# Altium PCB PCB2.PcbDoc
Units mil, origin at the board's own origin, x right, y up, seen from the top; angles counter-clockwise.
Board outline 1871.68 x 1704.78 mil, 2 copper layers (Top Layer, Bottom Layer); 45 components, 36 nets, 194 pads, 124 vias.
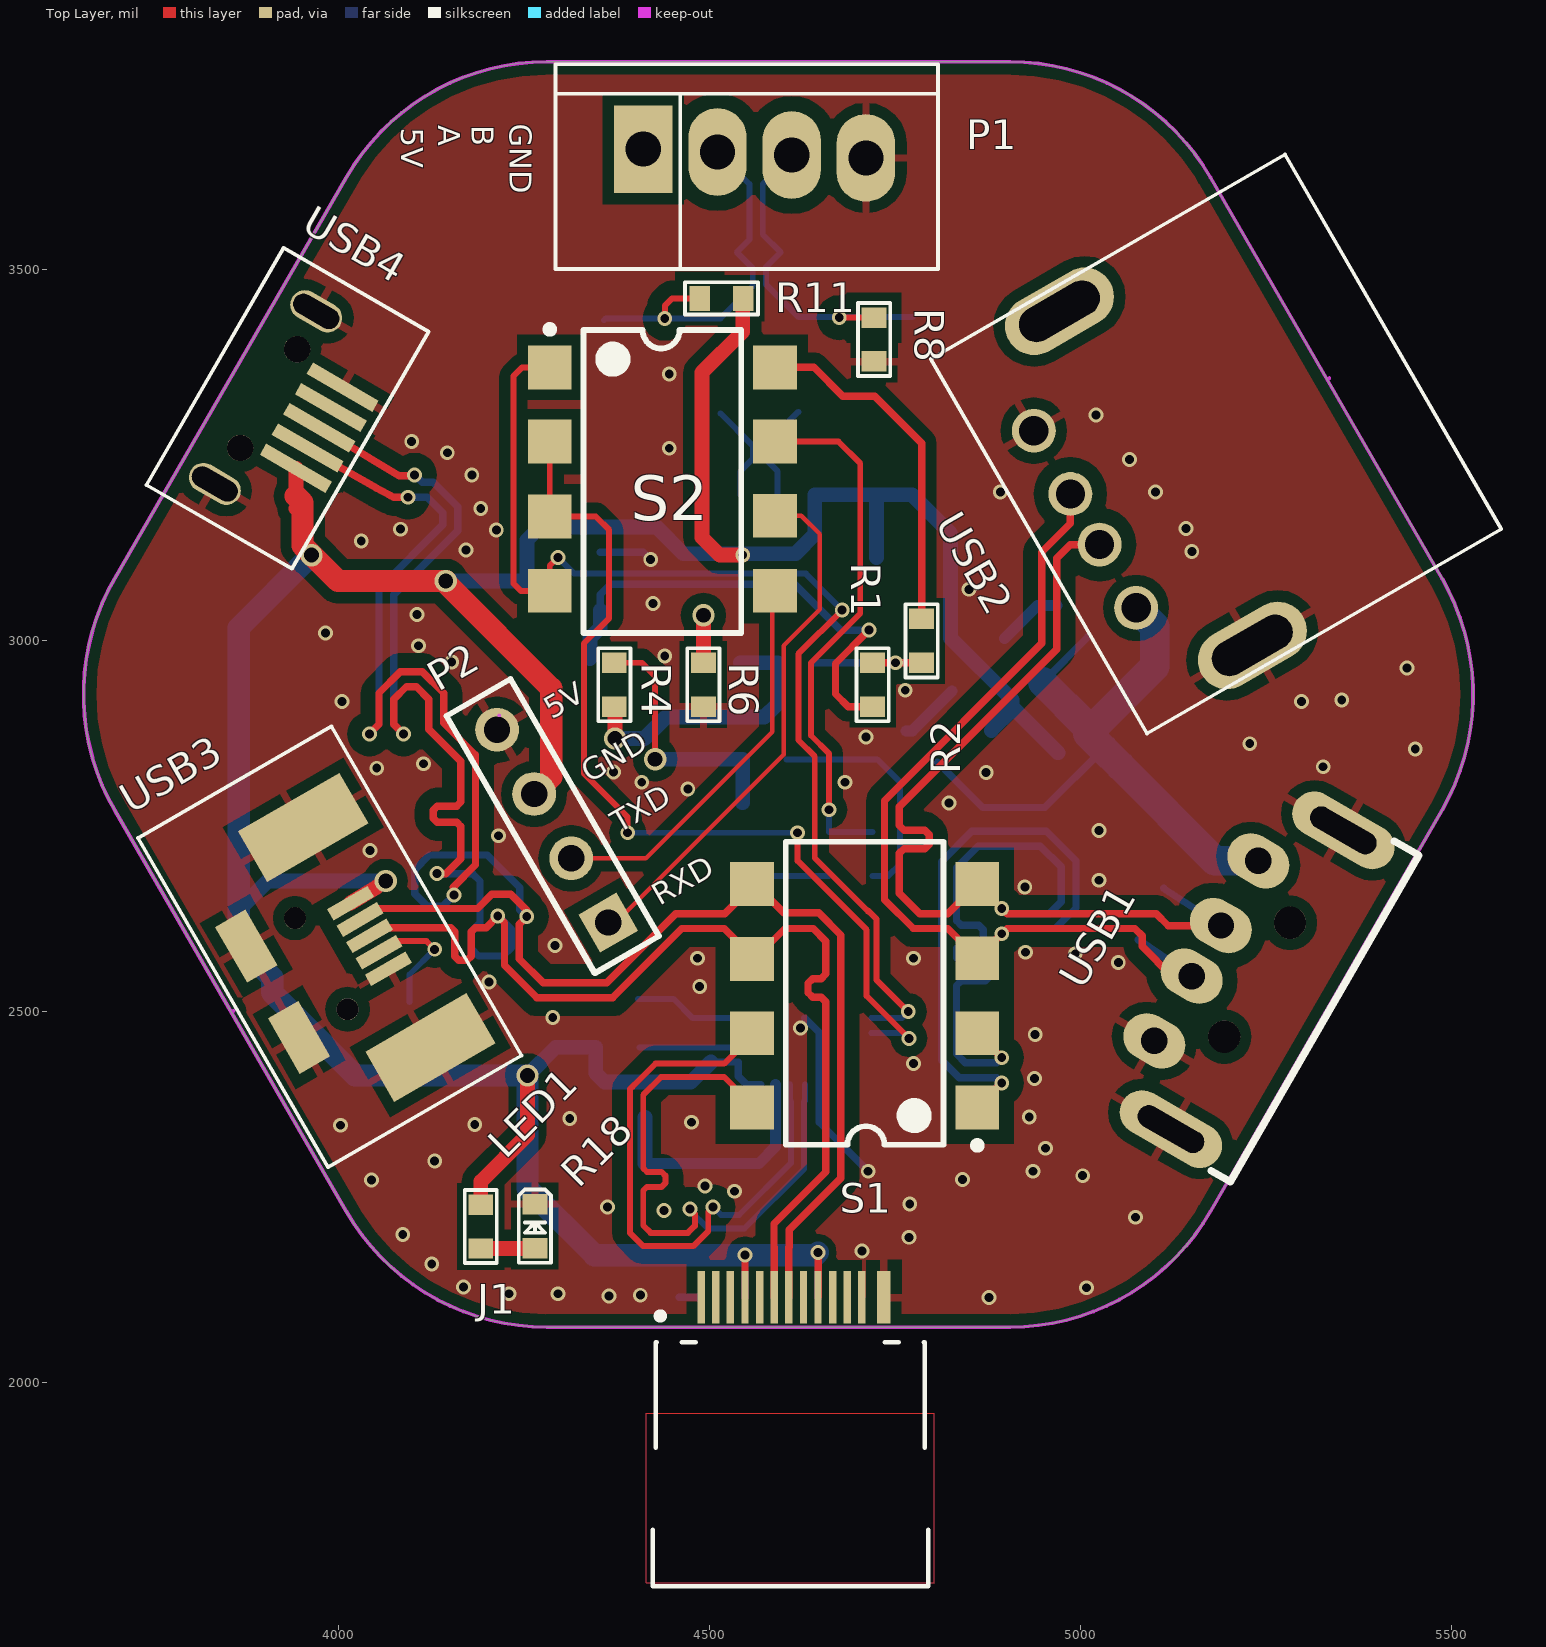
[diagram p0: Top Layer view]
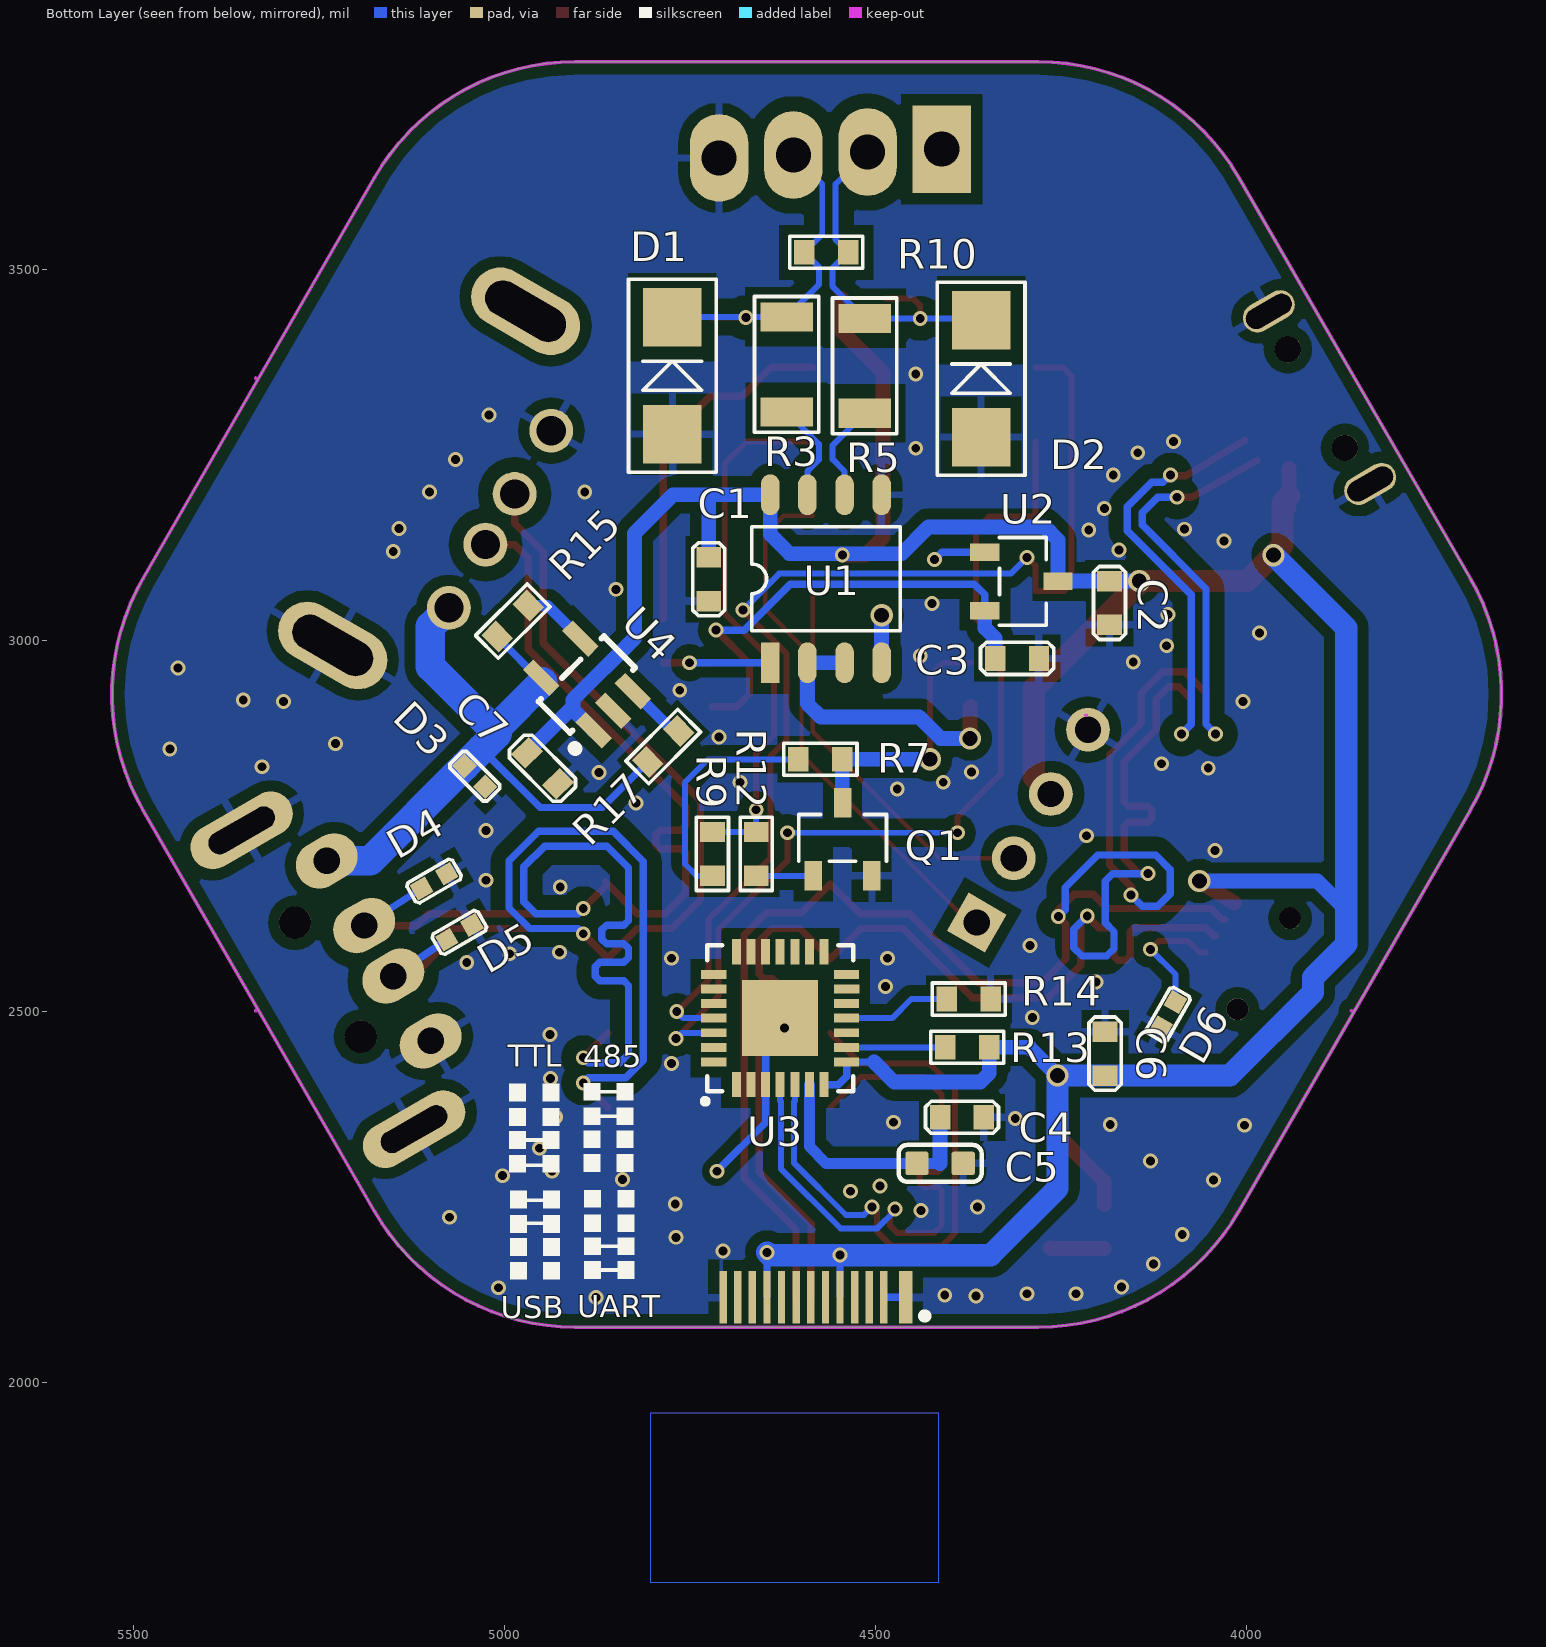
[diagram p1: Bottom Layer view, seen from below]

## Layer stack, top to bottom
Top Layer: signal copper 1.4
Dielectric: dielectric 12.6, FR-4, Dk 4.8
Bottom Layer: signal copper 1.4

## Board outline
4010.8,2231 3698.81,2771.39 cw(c3969,2927.39) 3698.81,3083.39 4010.8,3623.78 cw(c4281,3467.78) 4281,3779.78 4904.99,3779.78 cw(c4904.99,3467.78) 5175.19,3623.78 5487.18,3083.39 cw(c5216.99,2927.39) 5487.18,2771.39 5175.19,2231 cw(c4904.99,2387) 4904.99,2075 4281,2075 cw(c4281,2387)

## Design rules (kind name [scope] priority, off if disabled: settings)
Clearance usb [InNetClass('usb')] p1: gap=5
Clearance gnd [InPolygon] p2: gap=15
Clearance [All] p3: gap=5
DiffPairsRouting [All] p1: maxlimit=10 minlimit=6 mostfreqgap=10 maxuncoupledlength=500
PolygonConnect [IsVia] p1: connectstyle=Direct reliefconductorwidth=10 reliefentries=4 polygonreliefangle="90 Angle"
PolygonConnect PolygonConnect_1 [All] p2: connectstyle=Relief reliefconductorwidth=10 reliefentries=4 polygonreliefangle="90 Angle"
RoutingVias RoutingVias_1 [All] p1: holewidth=28 width=50 viastyle="Through Hole" minholewidth=28 minwidth=50 maxholewidth=28 maxwidth=50
RoutingVias [All] p2: holewidth=28 width=50 viastyle="Through Hole" minholewidth=28 minwidth=50 maxholewidth=28 maxwidth=50
SilkscreenOverComponentPads [All] p1: minsilkscreentomaskgap=1
SolderMaskExpansion [All] p1: expansion=4
Width [All] p1: maxlimit=200 minlimit=5 preferedwidth=10
26 further rules are at their usual default settings.

## Classes and differential pairs
net class usb: 485_N 485_P 4852_N 4852_P D2_N D2_P D3_N D3_P D_N D_P
component class 485: C1 C2 C3 D1 D2 D8 P1 Q1 Q19 R1 R2 R3 R4 R5 R6 R7 R8 R9 R10 R11 R12 R41 R43 R58 R83 R139 R218 U1 U2
component class connector: C4 C5 C6 C7 C61 D3 D4 D5 D6 D7 J1 LED1 "MICRO USB" P2 P3 R13 R14 R15 R17 R18 R19 R42 S1 S2 U3 U4 U7 USB1 USB2 USB3 USB4
differential pair 485: +485_P -485_N
differential pair 4852: +4852_P -4852_N
differential pair D: +D_P -D_N
differential pair D2: +D2_P -D2_N
differential pair D3: +D3_P -D3_N

## Components (designator, comment, footprint, x,y, rotation, side; value= is the part's Value field where it differs from the comment)
C1 "0.1uF" 0603C 4725,3053 r90 bottom
C2 "10uF/25V" 0603C 4185,3021 r90 bottom
C3 "10uF/25V" 0603C 4280,2976 r0 bottom
C4 "4.7uF/25V" 0603C 4354.25,2357.65 r0 bottom
C5 "0.1uF/50V" C0603 4413.25,2295.65 r180 top
C6 "10uF" 0603C 4191,2473 r270 bottom
C7 "47uF" 0603C 4928,2807 r45 bottom
D1 "SMAJ6.5CA" SMA 4774,3278 r90 bottom
D2 "SMAJ6.5CA" SMA 4358,3274 r90 bottom
D3 "PESDNC2FD5VB" C0402 5054,2831 r225 bottom
D4 "PESDNC2FD5VB" C0402 5112,2666 r150 bottom
D5 "PESDNC2FD5VB" C0402 5078,2597 r150 bottom
D6 "PESDNC2FD5VB" C0402 4096,2513 r300 bottom
J1 "TYPE C" Type_C-M 4489,2115 r0 top
LED1 "" 0603LED 4265,2181.55 r90 top
P1 "Header 4" 4X2.54MMZ 4411,3662 r0 top
P2 "Header 4" HDR1X4 4364,2620 r120 top
Q1 "MMBT3904" SOT23-3 4584,2683 r270 bottom
R1 "100k" 0603R 4720,2970 r270 top
R2 "1K" 0603R 4786,2970 r90 top
R3 "10" 1206R 4620,3436 r270 bottom
R4 "1K" 0603R 4372,2911 r90 top
R5 "10" 1206R 4515,3434 r270 bottom
R6 "1K" 0603R 4492,2970 r270 top
R7 "10K" 0603R 4545,2840 r0 bottom
R8 "1k" 0603R 4722,3435 r270 top
R9 "10K" 0603R 4720,2683 r90 bottom
R10 "100" 0603R 4537,3523 r0 bottom
R11 "1k" 0603R 4546,3461 r180 top
R12 "4.7K" 0603R 4661,2683 r90 bottom
R13 "1K/5%/1/8W" 0603R 4347,2452 r0 bottom
R14 "10K/5%/1/8W" 0603R 4345,2517 r0 bottom
R15 "10K/5%/1/8W" 0603R 4968,3047 r315 bottom
R17 "10K/5%/1/8W" 0603R 4765.31,2878.1 r315 bottom
R18 "1K" 0603R 4192,2240 r270 top
S1 "SW DIP-4" SW_SMT_8 4711,2421 r180 top
S2 "SW DIP-4" SW_SMT_8 4435,3318 r0 top
U1 "THVD1500" so-8 4642,2970 r90 bottom
U2 "XC6206P332MR" SOT23-3 4353,3119 r0 bottom
U3 "CP2102" QFN28N5X5-0p5P-L 4628.67,2491.21 r90 bottom
U4 "JW7115-2" SOT-23-5 4880,2879 r45 bottom
USB1 "USB-A-M" USB_A/P_A 5238,2543 r60 top
USB2 "USB-A-F" USB-A 5075,3044 r120 top
USB3 "Micro-USB" "MICRO USB M" 4042,2602 r30 top
USB4 "USB-MINI-A" MINIUSB-M 3943,3232 r330 top

## Footprints (in the part's own frame and the unit in brackets; to place one, negate y for a bottom-side part, rotate by r counter-clockwise, add the part's x,y. Pads: shape width x height; smd on the part's side, far side on the other; paste and mask are expansions set on the pad)
4X2.54MMZ [mm]
  rect 2x3 hole 1.2: 1(0,0)
  oval 2x3 hole 1.2: 2(2.54,-0.1) 3(5.08,-0.2) 4(7.62,-0.3)
  silkscreen extent -3,-4.1 10.08,2.9
0603C [mm]
  rect 0.7x0.85 smd: 1(0,0) 2(1.5,0)
  silkscreen extent -0.5,-0.55 2,0.55
0603LED [mm]
  rect 0.7x0.85 smd: 1(0,0) 2(1.5,0)
  silkscreen extent -0.5,-0.55 2,0.55
0603R [mm]
  rect 0.7x0.85 smd: 1(0,0) 2(1.5,0)
  silkscreen extent -0.5,-0.55 2,0.55
1206R [mm]
  rect 1x1.8 smd: 1(0,0) 2(3.25,0)
  silkscreen extent -0.7,-1.1 3.95,1.1
C0402 [mm]
  rect 0.6x0.6 smd: 1(0,0) 2(1,0)
  silkscreen extent -0.4,-0.4 1.4,0.4
C0603 [mm]
  rrect20% 0.8x0.8 smd far side: 1(-0.792,0) 2(0.792,0)
  body extent -0.8,-0.4 0.8,0.4, height 0.3
HDR1X4 [mm] "Connector; Header; 4 Position"
  rect 1.5x1.5 hole 0.9: 1(0,0)
  round 1.5 hole 0.9: 2(2.54,0) 3(5.08,0) 4(7.62,0)
  silkscreen extent -1.27,-1.27 8.89,1.27
"MICRO USB M" [mm]
  rect 1.6x0.45 smd: 1(0,-1.3) 2(0,-0.65) 3(0,0) 4(0,0.65) 5(0,1.3)
  rect 1.2x2.2 smd: 6(-3.82,1.8) 7(-3.82,-1.8)
  rect 4x2 smd: 8(-0.1,4.35) 9(-0.1,-4.35)
  round 0.75 hole 0.75 unplated: 11(-1.9,-1.8) 12(-1.9,1.8)
  silkscreen extent -5.18,-6.15 2.46,6.86
MINIUSB-M [mm]
  rect 2.6x0.45 smd: 1(0,0) 2(0,0.8) 3(0,1.6) 4(0,2.4) 5(0,3.2)
  oval 1.9x1 hole 0.7 slot 1.7 at 0 deg: 6(-2.134,-1.85) 7(-2.083,5)
  round 0.9 hole 0.9 unplated: 8(-2,3.55) 9(-2,-0.35)
  silkscreen extent -4.14,-3.05 1.6,6.32
QFN28N5X5-0p5P-L [mil]
  rect 34x12 smd mask+5: 1(-89.5,59.05) 2(-89.5,39.37) 3(-89.5,19.69) 4(-89.5,0) 5(-89.5,-19.68) 6(-89.5,-39.37) 7(-89.5,-59.05) 15(89.5,-59.05) 16(89.5,-39.37) 17(89.5,-19.68) 18(89.5,0) 19(89.5,19.68) 20(89.5,39.37) 21(89.5,59.05)
  rect 12x34 smd mask+5: 8(-59.05,-89.5) 9(-39.37,-89.5) 10(-19.68,-89.5) 11(0,-89.5) 12(19.68,-89.5) 13(39.37,-89.5) 14(59.05,-89.5) 22(59.05,89.5) 23(39.37,89.5) 24(19.68,89.5) 25(0,89.5) 26(-19.68,89.5) 27(-39.37,89.5) 28(-59.05,89.5)
  rect 102.36x102.36 smd mask+5: 29(0,0)
  silkscreen extent -114,-99 99,103
SMA [mm]
  rect 2x2 smd: 1(0,0) 2(4,0)
  silkscreen extent -1.3,-1.5 5.3,1.5
so-8 [mil]
  rect 55x25 smd: 1(0,0)
  oval 55x25 smd: 2(0,-50) 3(0,-100) 4(0,-150) 5(226.38,-150) 6(226.38,-100) 7(226.38,-50) 8(226.38,0)
  silkscreen extent 43,-175 183,25
SOT23-3 [mm]
  rect 1x0.6 smd: 1(0,0) 2(0,2) 3(-2.5,1)
  silkscreen extent -2.1,-0.5 -0.5,2.5
SOT-23-5 [mil]
  rect 50x20 smd: 1(0,0) 2(0,-37.4) 3(0,-74.8) 4(100,-74.8) 5(100,0)
  silkscreen extent 0,-99 80,35
SW_SMT_8 [mm] "DIP; 4 Leads; Row Spacing 7.62 mm; Pitch 2.54 mm"
  rect 1.5x1.5 smd: 1(-3.81,1.27) 2(-3.81,-1.27) 3(-3.81,-3.835) 4(-3.81,-6.375) 5(3.9,-6.375) 6(3.9,-3.81) 7(3.9,-1.27) 8(3.9,1.27)
  silkscreen extent -3.94,-7.82 2.74,2.69
Type_C-M [mm]
  rect 0.25x1.8 smd paste+0 mask+0: A1(0,0) A2(0.5,0) A3(1,0) A4(1.5,0) A5(2,0) A6(2.5,0) A7(3,0) A8(3.5,0) A9(4,0) A10(4.5,0) A11(5,0) A12(5.5,0)
  rect 0.45x1.8 smd far side paste+0 mask+0: A13(-0.75,0)
  rect 0.25x1.8 smd far side paste+0 mask+0: B1(5.5,0) B2(5,0) B3(4.5,0) B4(4,0) B5(3.5,0) B6(3,0) B7(2.5,0) B8(2,0) B9(1.5,0) B10(1,0) B11(0.5,0) B12(0,0)
  rect 0.45x1.8 smd paste+0 mask+0: B13(6.25,0)
  Multi-Layer lines w0.025: -1.88,-9.757 -1.88,-3.966 7.976,-3.966 7.976,-9.757 -1.88,-9.757
  silkscreen extent -1.65,-9.88 7.77,-0.53
USB-A [mm]
  round 1.5 hole 1: 1(0,0) 2(2.5,0) 3(4.5,0) 4(7,0)
  oval 2x4 hole 1.2 slot 3 at 90 deg: 5(-3.1,-2.8) 6(10.1,-2.8)
  silkscreen extent -3.91,-12.17 10.89,1.83
USB_A/P_A [mm] "A型USB 插头，20*"
  round 1.1 hole 1.1 unplated: 0(-2.25,0) 0(2.25,0)
  oval 1.6x2.2 hole 0.9: 1(3.543,2) 2(0.987,2) 3(-1.013,2) 4(-3.569,2)
  oval 1.524x3.81 hole 0.762 slot 2.5 at 90 deg: 5(-5.9,0) 5(5.9,0)
  silkscreen extent -6.45,-2.67 6.45,-1.7, body extent -14.3,-23.1 14.54,6.61, height 3.25

## Part data
C1 C2 C3: library part C, "C"
C4 C5: library part Cap, "Capacitor"
C6 C7: library part CAP, "Capacitor"
D1 D2: library part "DIODE S", "Schottky Diode"
D3 D4 D5 D6: library part 1_1.5KE100A_Dup1
LED1: library part LED
P1 P2: "Header, 4-Pin"
Q1: library part NPN
R1 R3 R5 R8 R11: library part RES2
R2 R4 R6 R10 R18: library part R, "R"
R7 R9 R12: library part RES1
R13 R14 R15 R17: library part Res2, "Resistor"
S1 S2: "DIP Switch, 4 Position, SPST"
U1: library part SN65HVD06D
U2: library part XC6206P302MR
U3: "Imported"
USB1 USB2: library part "Header 5", "Header, 5-Pin"
USB3 USB4: library part USB

## Via types
v1: diameter 20, hole 12, Top Layer to Bottom Layer, tented both sides, 117 vias
v2: diameter 30, hole 20, Top Layer to Bottom Layer, tented both sides, 7 vias

## Nets (pads, with @x,y where several pads share a name; then routed paths per layer and width w, separated by ;. In a path a pad name is that pad's centre, name@x,y a point inside that pad or via, vN(x,y) a via of type N, cw(c..) or ccw(c..) an arc to the next point about the centre after c; other vN are vias at no path point)
485_EN1: Q1.3 R4.2 R7.1 | length 351.2
  Top Layer w8: R4.2 4408.94,2970.06 4427,2952 v2(4427,2840)
  Bottom Layer w20: v2(4427,2840) R7.1 4545,2781.8 Q1.3
485_N: D1.2 P1.3 R3.1 R8.1 R10.2 | length 471.6
  Top Layer w8: v1(4675,3435) R8.1
  Bottom Layer w8: P1.3 4572,3615.13 4572,3547.06 R10.2 4576.5,3503.44 4576.5,3479.5 R3.1 4773.48,3436 D1.2
485_P: D2.2 P1.2 R5.1 R10.1 R11.2 | length 502
  Top Layer w8: v1(4440,3434) 4440,3451 4450,3461 R11.2
  Bottom Layer w8: D2.2 4360.52,3434 v1(4440,3434) R5.1 4558.5,3477.5 4558.5,3501.5 R10.1 4554,3540 4554,3615.06 P1.2
4852_N: R5.2 U1.6 | length 134.8
  Bottom Layer w8: R5.2 4558.5,3262.55 4558.5,3244 4558,3244 4542,3228 U1.6
4852_P: R3.2 U1.7 | length 136.1
  Bottom Layer w8: U1.7 4592,3228 4576.5,3243.5 4576.5,3244 4576.5,3264.55 R3.2
+5V: D3.1 R15.2 R17.2 U4.5 USB1.1 USB2.1 | length 1043.1
  Bottom Layer w10: R17.2 4868.42,2775 4952.04,2775 5030.78,2853.74 5031.02,2853.98 ; U4.5@4949,2944 5009.76,3004.76 R15.2
  Bottom Layer w40: U4.5@4949,2944 5009.76,2883.24 5009.76,2874.76 ; D3.1 5031.02,2853.98 5010.24,2874.76 5009.76,2874.76 ; USB2.1 5100,3019 5100,2965 5009.76,2874.76 ; USB1.1 5181.35,2703.16 5053.76,2830.76 5030.78,2853.74 5009.76,2874.76
AGND: C1.1 C2.1 C3.1 C4.1 C5.2 C6.1 C7.1 D1.1 D2.1 D3.2 D4.2 D5.2 D6.2 J1.A1 J1.A12 J1.A13 J1.B1 J1.B12 J1.B13 LED1.2 P1.4 P2.4 Q1.2 R6.2 R8.2 R14.1 U1.5 U2.1 U3.3 U3.29 U4.2 USB1.4 USB1.5 USB2.4 USB2.5 USB3.1 USB3.6 USB3.7 USB3.8 USB3.9 USB4.5 USB4.6 USB4.7 | length 343.2
  Bottom Layer w10: U2.1 4411,3119 v1(4421,3109) ; J1.A13 J1.B12 ; U3.29 4648.35,2471.53 4648.35,2419 U3.3 4648.35,2350.65 v1(4714,2285)
  other v1: 4877,2115 4365,2117 4407,2118 4230,2120 4296,2120 5008,2128 4169,2129 4126,2160 4705.54,2177.54 4769,2196 4087,2200 5074,2223 4439,2232 4363,2237 4770,2241 4534,2258 4494,2265 4045,2273 4841,2274 5003,2279 4936,2285 4130,2299 4953,2316 4003,2347 4184,2348 4476,2351 4312,2356 4931,2358 4938,2410 4775,2430 4939,2469 4623,2478 4289,2492 4487,2534 4203,2540 5051,2566 4484,2572 4775,2572 4993,2578 4926,2580 4292,2589 4925,2668 5025,2677 4043,2717 4216,2737 5025,2744 4823,2781 4471,2800 4409,2809 4683,2809 4873,2822 4371,2823 4052,2828 5327,2830 4115,2834 5451,2854 5228,2861 4711,2870 4005,2918 5298,2918 5352,2920 4764,2933 5440,2963 4153,2971 4440,2979 4108,2993 3983,3010 4106,3035 4424,3050 4850,3069 5150,3120 4172,3122 4031,3134 4213,3149 4084,3150 5142,3151 4192,3178 4892,3200 5101,3200 4180,3223 5066,3244 4147,3253 4446,3259 4099,3268 5021,3304 4446,3359
CP_RXD: S2.1 S2.4 U3.25 | length 1529.3
  Top Layer w8: S2.1 4248,3368 4236,3356 4236,3077 4246,3067 S2.4 4285,3101 v1(4296,3112) ; v1(4679,3041) 4620,2982 4620,2866 4642,2844 4642,2707 4714,2635 ; 4714,2636 4725,2625 4725,2543 v1(4768,2500)
  Bottom Layer w8: v1(4296,3112) 4318,3090 4630,3090 v1(4679,3041) ; U3.25 4759.21,2491.21 v1(4768,2500)
CP_TXD: S2.2 S2.3 U3.26 | length 1257.1
  Top Layer w8: S2.2 S2.3 4347,3167 4365,3149 4365,3030 4331,2996 4331,2820.98 4390,2761.98 v1(4390,2741) ; v1(4619,2741) 4619,2703.13 4712,2610.13 4712,2521 v1(4769,2464)
  Bottom Layer w8: v1(4390,2741) v1(4619,2741) ; U3.26 4761.47,2471.53 v1(4769,2464)
D2_N: S1.8 U3.4 | length 816.3
  Top Layer w8: v1(4474,2234) 4480.5,2227.5 4480.5,2215 4480.5,2211.5 4471,2202 4421,2202 4411,2212 4411,2259 4416,2264 4435.79,2264 4440.79,2269 4440.79,2279 4435.79,2284 4416,2284 4411,2289 4411,2360 4411,2388 4435,2412 4520,2412 S1.8@4561,2371
  Bottom Layer w8: v1(4474,2234) 4474,2232 4498,2208 4547.46,2208 4627.83,2288.37 4627.83,2379.16 4628.67,2380 U3.4
D2_P: S1.7 U3.5 | length 817.8
  Top Layer w8: 4393,2370 4393,2358 ; 4396.27,2398.73 4404.47,2406.93 ; v1(4505,2237) 4498.5,2230.5 4498.5,2204.04 4478.46,2184 4411,2184 4393,2202 4393,2358 ; S1.7@4561,2471 4520,2430 4427.54,2430 4404.47,2406.93 ; 4393,2358 4393,2395.46 4404.47,2406.93
  Bottom Layer w8: v1(4505,2237) 4516,2226 4540,2226 4609.83,2295.83 4609.83,2379.16 4608.98,2380 U3.5
D3_N: D4.1 S1.2 S1.4 USB1.2 USB2.2 | length 2051.5
  Top Layer w10: S1.2 v1(4894,2438) ; S1.4@4864,2675 S1.4 ; USB2.2 4986.24,3129.24 4968,3111 4968,2988 4756,2776 4756,2750.75 4762.25,2744.5 4790.02,2744.5 4796.27,2738.25 4796.27,2725.75 4790.02,2719.5 4762.25,2719.5 4756,2713.25 4756,2659.28 4783.28,2632 4821,2632 S1.4 ; USB1.2 5117.98,2616.02 5102,2632 4901,2632 v1(4894,2639) S1.4
  Bottom Layer w10: v1(4894,2438) 4887,2431 4845,2431 4833,2443 4833,2535.25 4839.25,2541.5 4871.71,2541.5 4877.96,2547.75 4877.96,2560.25 4871.71,2566.5 4839.25,2566.5 4833,2572.75 4833,2585.25 4839.25,2591.5 4862.71,2591.5 4868.96,2597.75 4868.96,2610.25 4862.71,2616.5 4839.25,2616.5 4833,2622.75 4833,2694 4862,2723 4946,2723 4974,2695 4974,2648 4958,2632 4901,2632 v1(4894,2639) ; D4.1 USB1.2
D3_P: D5.1 S1.1 S1.3 USB1.3 USB2.3 | length 2041.7
  Top Layer w10: S1.1 v1(4894,2404) ; USB2.3 4986.42,3157.7 4948,3119.28 4948,2996.28 4736,2784.28 4736,2651 4775,2612 4821,2612 S1.3 v1(4894,2605) 4901,2612 5073,2612 5083,2602 5083,2588 5123.18,2547.82 USB1.3 USB1.3@5149.86,2554.14
  Bottom Layer w10: v1(4894,2404) 4887,2411 4836.72,2411 4813,2434.72 4813,2702.28 4853.72,2743 4954.28,2743 4994,2703.28 4994,2639.72 4966.28,2612 4901,2612 v1(4894,2605) ; D5.1 USB1.3
D_N: J1.A7 S1.5 USB3.4 USB4.2 | length 2658.8
  Top Layer w10: USB4.2@3986.75,3242.28 4052,3205 4071,3195 ; USB3.4 4033.16,2624.16 4048,2639 4188,2639 4207,2658 4232.5,2658 4254,2636.5 v1(4254,2628) 4244,2618 4244,2571 4276,2539 4361.72,2539 4454.72,2632 4521,2632 4561,2672 4600,2633 4647.28,2633 4677,2603.28 4677,2275.72 4607.43,2206.14 4607.43,2190.86 4607.43,2182.57 ; v1(4042,2874) 4055,2887 4055,2929.28 4083.72,2958 4113.28,2958 4142,2929.28 4142,2888.84 4185,2845.84 4185,2697.72 4155.14,2667.86 4156,2667 v1(4156,2657) ; 4075,3193 v1(4094,3193) ; J1.A7 4607.11,2182.89
  Bottom Layer w10: v1(4042,2874) 4055,2887 4055,3070 4141,3156 4141,3172 4120,3193 v1(4094,3193) ; v1(4156,2657) 4141,2642 4120,2642 4103,2659 4103,2691.36 4122.64,2711 4200.78,2711 4244.5,2667.28 4244.5,2637.5 v1(4254,2628)
D_P: J1.A6 S1.6 USB3.3 USB4.3 | length 2658.8
  Top Layer w10: USB4.3@4002.5,3269.55 4082,3222 4102,3222 v1(4103,3223) ; USB3.3 4044.81,2602 4056.07,2613.26 4124,2613.26 4135,2613.26 4151.5,2613.26 4157,2607.76 4157,2574.54 4162.5,2569.04 4173.5,2569.04 4179,2574.54 4179,2607.76 4184.5,2613.26 4189,2613.26 4199.26,2613.26 v1(4215,2629) 4224,2620 4224,2562.72 4267.72,2519 4370,2519 4463,2612 4520,2612 4561,2571 4602,2612 4640,2612 4657,2595 4657,2582 4657,2569.5 4657,2550.75 4650.75,2544.5 4639.15,2544.5 4632.9,2538.25 4632.9,2525.75 4639.15,2519.5 4650.75,2519.5 4657,2513.25 4657,2500 4657,2284 4587.11,2214.11 4587.11,2182.89 4587.11,2182.57 ; v1(4088,2874) 4075,2887 4075,2921 4092,2938 4105,2938 4122,2921 4122,2880.55 4165,2837.55 4165,2782.5 4159.5,2777 4133.56,2777 4128.06,2771.5 4128.06,2760.5 4133.56,2755 4159.5,2755 4165,2749.5 4165,2706 4145,2686 v1(4133,2686) ; J1.A6 4587.43,2182.57
  Bottom Layer w10: v1(4088,2874) 4075,2887 4075,3061.72 4161,3147.72 4161,3180.28 4128.28,3213 4113,3213 v1(4103,3223) ; v1(4133,2686) 4181,2686 4191,2676 4191,2620 4179,2608 4179,2585 4189,2575 4222,2575 4233,2586 4233,2611 v1(4215,2629)
DTR: U3.28
NetC4_2: C4.2 C5.1 U3.6 | length 330.9
  Bottom Layer w15: 4413.25,2295.65 4566.65,2295.65 4589.3,2318.3 4589.3,2376 U3.6
  Bottom Layer w20: 4413.25,2295.65 4413.3,2295.71 C4.2
NetD6_1: D6.1 USB3.2 | length 171.1
  Top Layer w8: USB3.2 4063.84,2579.84 4079,2595 4119,2595 v1(4130,2584)
  Bottom Layer w8: D6.1 4096,2550 v1(4130,2584)
NetLED1_1: LED1.1 R18.2 | length 73.3
  Top Layer w20: R18.2 4264.39,2180.94 LED1.1
NetP2_1: P2.1 S2.6 | length 721.3
  Top Layer w6: P2.1 4374,2620 4600,2846 4600,2993 4649,3042 4649,3143 4624,3168 S2.6@4585,3168
NetP2_2: P2.2 S2.5 | length 531.6
  Top Layer w6: P2.2 4414.6,2706.6 4585,2877 S2.5@4585,3067
NetQ1_1: Q1.1 R12.1 | length 77
  Bottom Layer w8: Q1.1 R12.1
NetR1_1: R1.1 R2.1 U1.1 | length 184
  Top Layer w10: R1.1 v1(4751,2970) R2.1
  Bottom Layer w10: U1.1 4664,2970 ; 4673,2970 4664,2970 ; v1(4751,2970) 4664,2970
NetR4_1: R4.1 U1.2 U1.3 | length 388.3
  Top Layer w20: v2@4372,2869 v2(4373,2868) 4373,2910 R4.1
  Bottom Layer w20: v2(4373,2868) 4412.57,2868 4441.57,2897 4574,2897 4592,2915 U1.2 U1.3
NetR6_1: R6.1 U1.4 | length 128
  Top Layer w20: R6.1 v2(4492,3034)
  Bottom Layer w20: U1.4 v2(4492,3034)
NetR13_2: R13.2 U3.9 | length 133.2
  Bottom Layer w8: R13.2 4406.21,2451.84 U3.9
NetR14_2: R14.2 U3.11 | length 145.8
  Bottom Layer w8: R14.2 4452,2517 4477.79,2491.21 U3.11
NetR15_1: R15.1 U4.4 | length 88.6
  Bottom Layer w15: U4.4 4942.21,3047 4962.3,3047 R15.1
NetR17_1: R17.1 U4.3 | length 84.1
  Bottom Layer w15: R17.1 4773.31,2878.1 U4.3
RS485_RXD1: R2.2 S2.8 | length 480.2
  Top Layer w10: S2.8@4585,3368 4641,3368 4680,3329 4723,3329 4786,3266 R2.2
RS485_TXD1: R9.2 R12.2 S2.7 | length 723.5
  Top Layer w8: S2.7@4585,3268 4674,3268 4703.35,3238.65 4703.35,3036.35 4637,2970 4637,2872 4661,2848 v1(4661,2772)
  Bottom Layer w8: v1(4661,2772) R12.2 R9.2
RTS: U3.24
VCC: P1.1
VCC-5V: C1.2 C2.2 C6.2 C7.2 J1.A4 J1.A9 J1.B4 J1.B9 P2.3 R11.1 R13.1 R18.1 U1.8 U2.3 U3.7 U3.8 U4.1 USB3.5 USB4.1 | length 5177.9
  Top Layer w10: J1.A4 v1(4548.06,2171.94) ; J1.A9 v1(4646.48,2175.48)
  Top Layer w20: 3943,3178 3952,3169 ; 3943,3194.69 USB4.1 ; USB3.5 4052,2668 v2(4064,2676) ; R18.1 4192,2271 4255,2334 v2(4255,2414) ; v1(4545,3115) 4514,3115 4490,3139 4490,3361 4545,3416 ; 4545,3434 4545,3416 ; R11.1 4545,3460 4545,3416
  Top Layer w30: 3942.85,3194.85 3943,3194.69 3952,3185.69 3952,3169 3952,3128 3999.94,3080.06 v2(4145,3080.06) 4145,3077.54 4287,2935.54 4287,2816.21 P2.3
  Bottom Layer w10: 4502.16,2432.16 U3.8 4539.17,2412.83 4550.29,2401.71 U3.7 ; J1.B9 v1(4548.06,2171.94) ; J1.B4 v1(4646.48,2175.48)
  Bottom Layer w20: 3866,2637 3905,2676 v2(4064,2676) ; v2(4145,3080.06) C2.2 4254.15,3080.06 U2.3 4254.57,3135.57 4272,3153 4429,3153 4465,3117 4616,3117 4642,3143 U1.8 4731,3196.38 ; v2(4255,2414) 4293,2452 R13.1 4347,2417 4359,2405 4475,2405 4502.16,2432.16 ; C1.2 4725,3190.38 4731,3196.38 ; U4.1 4908.02,2907.02 4908.02,2910.5 ; C7.2 4908.02,2910.5 ; 4731,3196.38 4773,3196.38 4825,3144.38 4825,3003 4908.02,2919.98 4908.02,2910.5
  Bottom Layer w30: v2(3964,3115) 3866,3017 3866,2637 3866,2591 3911,2546 3911,2526 4023,2414 v2(4255,2414) 4255,2262 4345.06,2171.94 v1(4548.06,2171.94) 4642.94,2171.94 v1(4646.48,2175.48)
VCC_3.3V: C3.2 R1.2 U2.2 | length 647
  Top Layer w10: v1(4715,3014) 4670,2969 4670,2928 4687.06,2910.94 R1.2
  Bottom Layer w10: U2.2 4353,3062 4367,3076 4615,3076 4677,3014 v1(4715,3014)
  Bottom Layer w20: C3.2 4339.06,3003.06 4353,3017 U2.2
VCC_3.3V_S: R7.2 R9.1 | length 319.4
  Bottom Layer w8: R7.2 4726,2840 4757,2809 4757,2699 4741,2683 R9.1
pads on no net: J1.A2 J1.A3 J1.A5 J1.A8 J1.A10 J1.A11 J1.B2 J1.B3 J1.B5 J1.B6 J1.B7 J1.B8 J1.B10 J1.B11 U3.1 U3.2 U3.10 U3.12 U3.13 U3.14 U3.15 U3.16 U3.17 U3.18 U3.19 U3.20 U3.21 U3.22 U3.23 U3.27 USB1.0 USB2.6 USB3.11 USB3.12 USB4.4 USB4.8 USB4.9

## Polygon pours and split planes (outlines as drawn)
AGND on Top Layer "Mid-Layer 1-No Net" (solid, remove dead copper, pour order 1000): 3469,4151.06 3715,3905.06 5765,3905.06 5765,2534.06 5315,2084.06 5219,1988.06 3771,1988.06 3771,2123.06 3053,2841.06 3516,3304.06 3516,4134.06
AGND on Bottom Layer "Mid-Layer 1-No Net" (solid, remove dead copper, pour order 1001): 3474.49,3979.35 3575.49,3878.35 6257.49,3878.35 6257.49,2094.35 6106.49,1943.35 5993.49,1830.35 4500.49,1830.35 4082.49,1830.35 3633.49,2279.35 3451.49,2461.35 3451.49,3630.35 3451.49,3801.35 3544.49,3894.35

## Keep-outs
Keep-Out Layer:
  circle w2.5: c4216.75,2899.22 r1.25
  circle w2.5: c3858.94,2501.19 r1.25
  circle w2.5: c4597.13,2075 r1.25
  circle w2.5: c5335.32,2501.19 r1.25
  circle w2.5: c5335.32,3353.58 r1.25
  circle w2.5: c4597.13,3779.78 r1.25
  lines w5: 3698.81,2771.39 cw(c3969,2927.39) 3698.81,3083.39 4010.8,3623.78 cw(c4281,3467.78) 4281,3779.78 4904.99,3779.78 cw(c4904.99,3467.78) 5175.19,3623.78 5487.18,3083.39 cw(c5216.99,2927.39) 5487.18,2771.39 5175.19,2231 cw(c4904.99,2387) 4904.99,2075 4281,2075 cw(c4281,2387) 4010.8,2231 3698.81,2771.39

## Silkscreen, mask and mechanical layers (free items; w line width, h text height)
Top Overlay:
  text "GND" at 4231,3696 h30 r270
  text "A" at 4135,3694 h30 r270
  text "B" at 4180,3694 h30 r270
  text "5V" at 4085,3691 h30 r270
  text "5V" at 4288,2893 h30 r30
  text "GND" at 4338,2808 h30 r30
  text "TXD" at 4378,2740 h30 r30
  text "RXD" at 4433,2642 h30 r30
Bottom Overlay:
  rectangle: 4826,2380 4849,2404
  rectangle: 4871,2380 4894,2404
  rectangle: 4971,2379 4994,2403
  rectangle: 4971,2346 4994,2370
  rectangle: 4971,2315 4994,2339
  rectangle: 4971,2283 4994,2307
  rectangle: 4926,2283 4949,2307
  rectangle: 4926,2315 4949,2339
  rectangle: 4926,2346 4949,2370
  rectangle: 4926,2379 4949,2403
  rectangle: 4826,2347 4849,2371
  rectangle: 4826,2316 4849,2340
  rectangle: 4826,2284 4849,2308
  rectangle: 4871,2284 4894,2308
  rectangle: 4871,2316 4894,2340
  rectangle: 4871,2347 4894,2371
  rectangle: 4870,2203 4893,2227
  rectangle: 4870,2172 4893,2196
  rectangle: 4870,2140 4893,2164
  rectangle: 4825,2140 4848,2164
  rectangle: 4825,2172 4848,2196
  rectangle: 4825,2203 4848,2227
  rectangle: 4925,2235 4948,2259
  rectangle: 4925,2202 4948,2226
  rectangle: 4925,2171 4948,2195
  rectangle: 4925,2139 4948,2163
  rectangle: 4970,2139 4993,2163
  rectangle: 4970,2171 4993,2195
  rectangle: 4970,2202 4993,2226
  rectangle: 4970,2235 4993,2259
  rectangle: 4870,2236 4893,2260
  rectangle: 4825,2236 4848,2260
  lines w5: 4842,2184 4872,2184 ; 4844,2152 4874,2152 ; 4846,2359 4876,2359 ; 4846,2392 4876,2392 ; 4941,2215 4971,2215 ; 4942,2293 4972,2293 ; 4946,2246 4976,2246 ; 4946,2327 4976,2327
  text "TTL" at 4996,2426 h30
  text "485" at 4894,2425 h30
  text "UART" at 4902,2088 h30
  text "USB" at 5005,2087 h30
Mechanical 1:
  circle w2.5: c4216.75,2899.22 r1.25
  circle w2.5: c3858.94,2501.19 r1.25
  circle w2.5: c4597.13,2075 r1.25
  circle w2.5: c5335.32,2501.19 r1.25
  circle w2.5: c5335.32,3353.58 r1.25
  circle w2.5: c4597.13,3779.78 r1.25
  circle w2.5: c5278.62,4608.98 r1.25
  circle w2.5: c4593,3779.78 r1.25
  circle w2.5: c5331.18,3353.58 r1.25
  circle w2.5: c5331.18,2501.19 r1.25
  circle w2.5: c4593,2075 r1.25
  circle w2.5: c3854.81,2501.19 r1.25
  circle w2.5: c3854.81,3353.58 r1.25
  lines w5: 3698.81,2771.39 cw(c3969,2927.39) 3698.81,3083.39 4010.8,3623.78 cw(c4281,3467.78) 4281,3779.78 4904.99,3779.78 cw(c4904.99,3467.78) 5175.19,3623.78 5487.18,3083.39 cw(c5216.99,2927.39) 5487.18,2771.39 5175.19,2231 cw(c4904.99,2387) 4904.99,2075 4281,2075 cw(c4281,2387) 4010.8,2231 3698.81,2771.39